# Altium PCB PCB_A0.PcbDoc
Units mil, origin at the board's own origin, x right, y up, seen from the top; angles counter-clockwise.
Board outline 3937.01 x 3937.01 mil, 2 copper layers (Top Layer, Bottom Layer); 126 components, 110 nets, 442 pads, 52 vias.
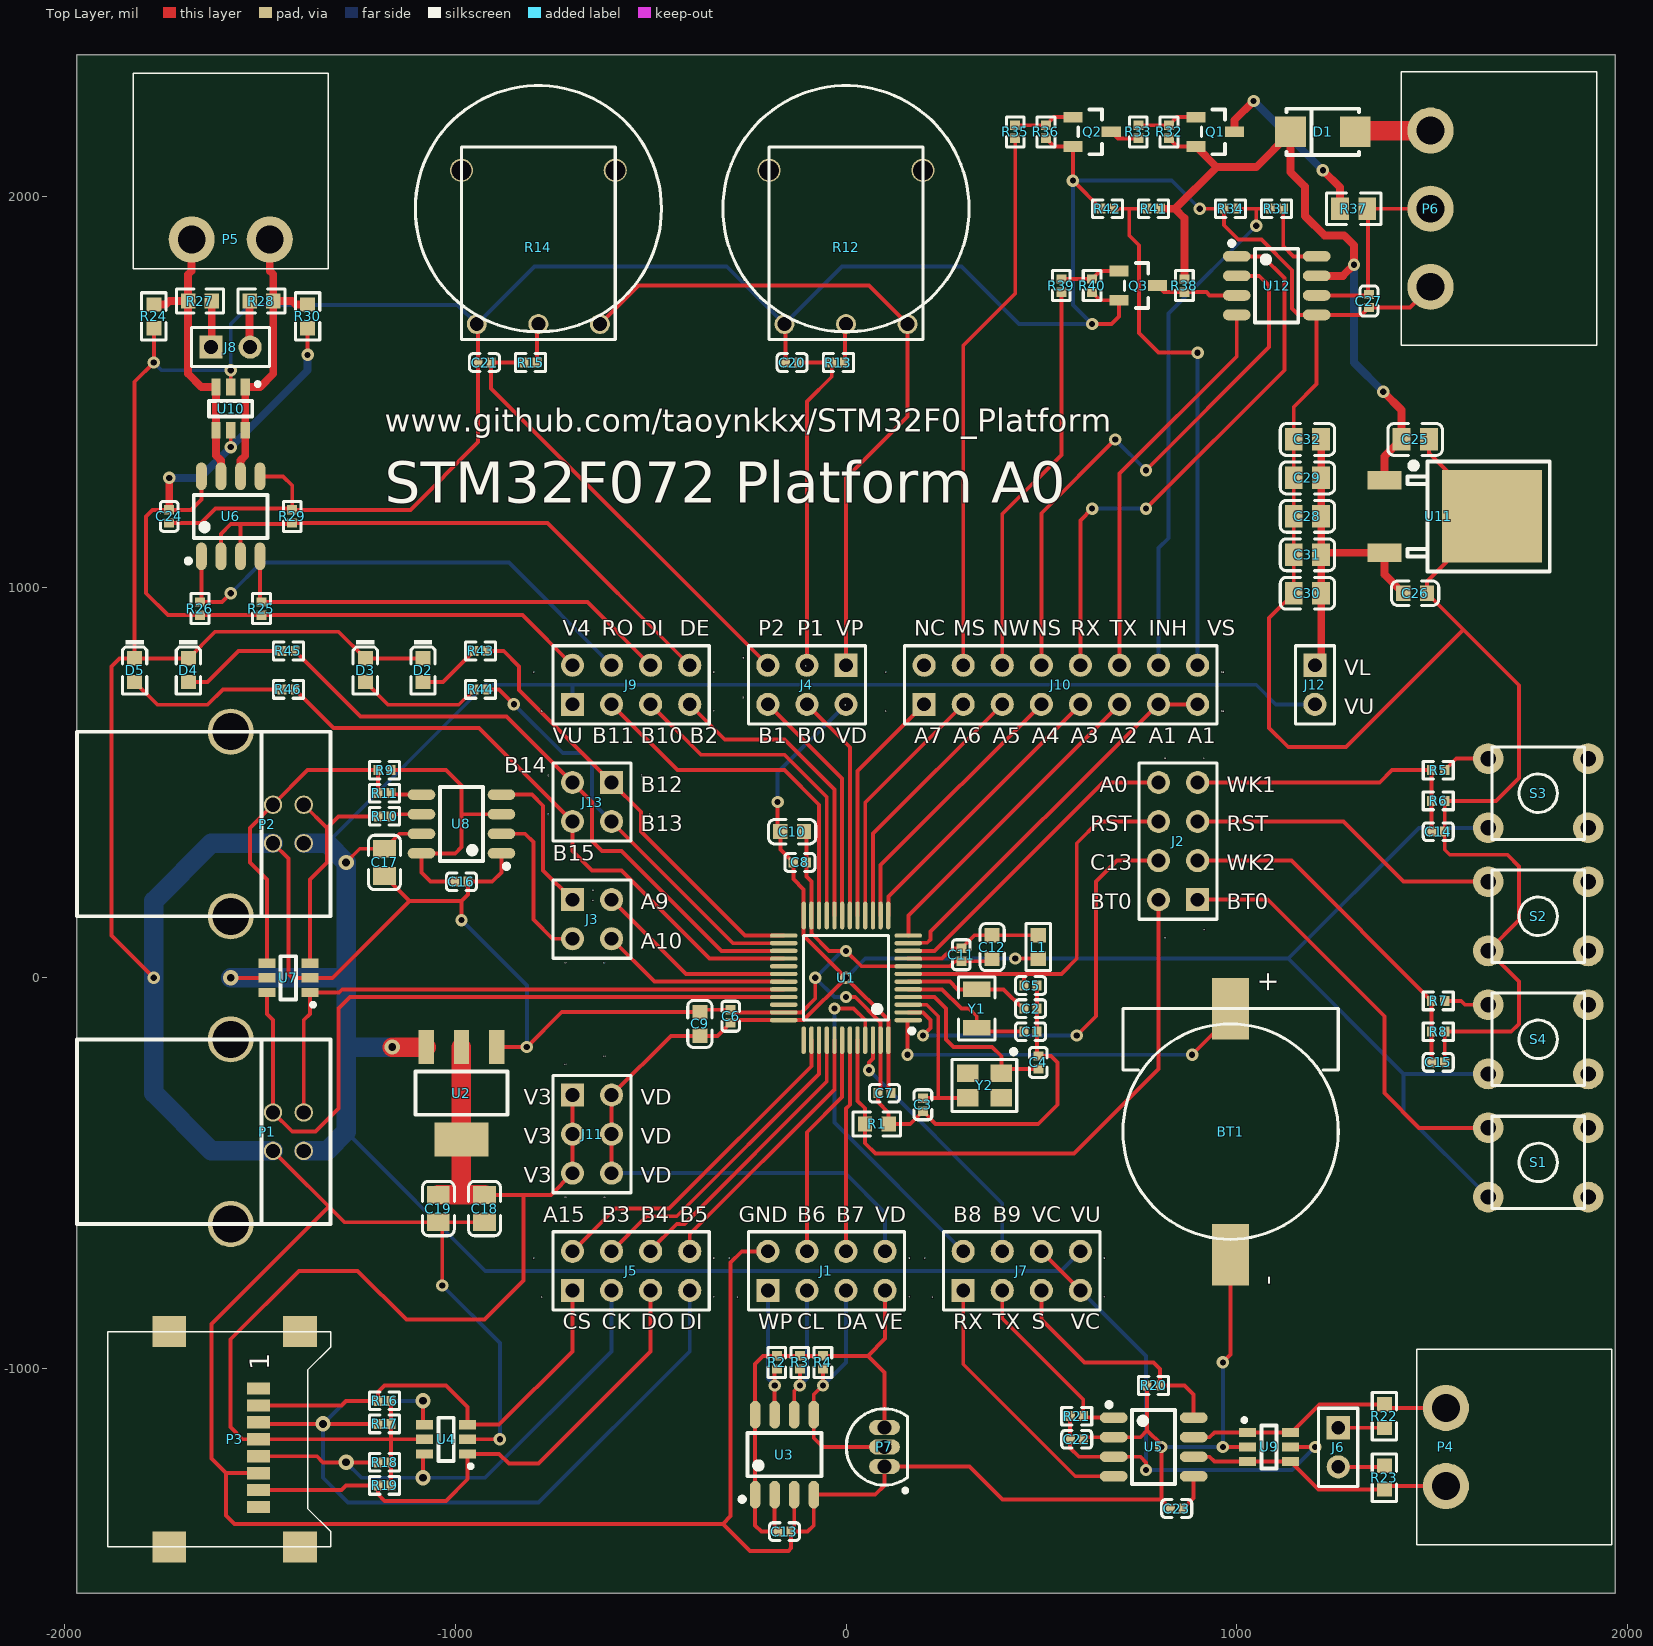
[diagram p0: Top Layer view]
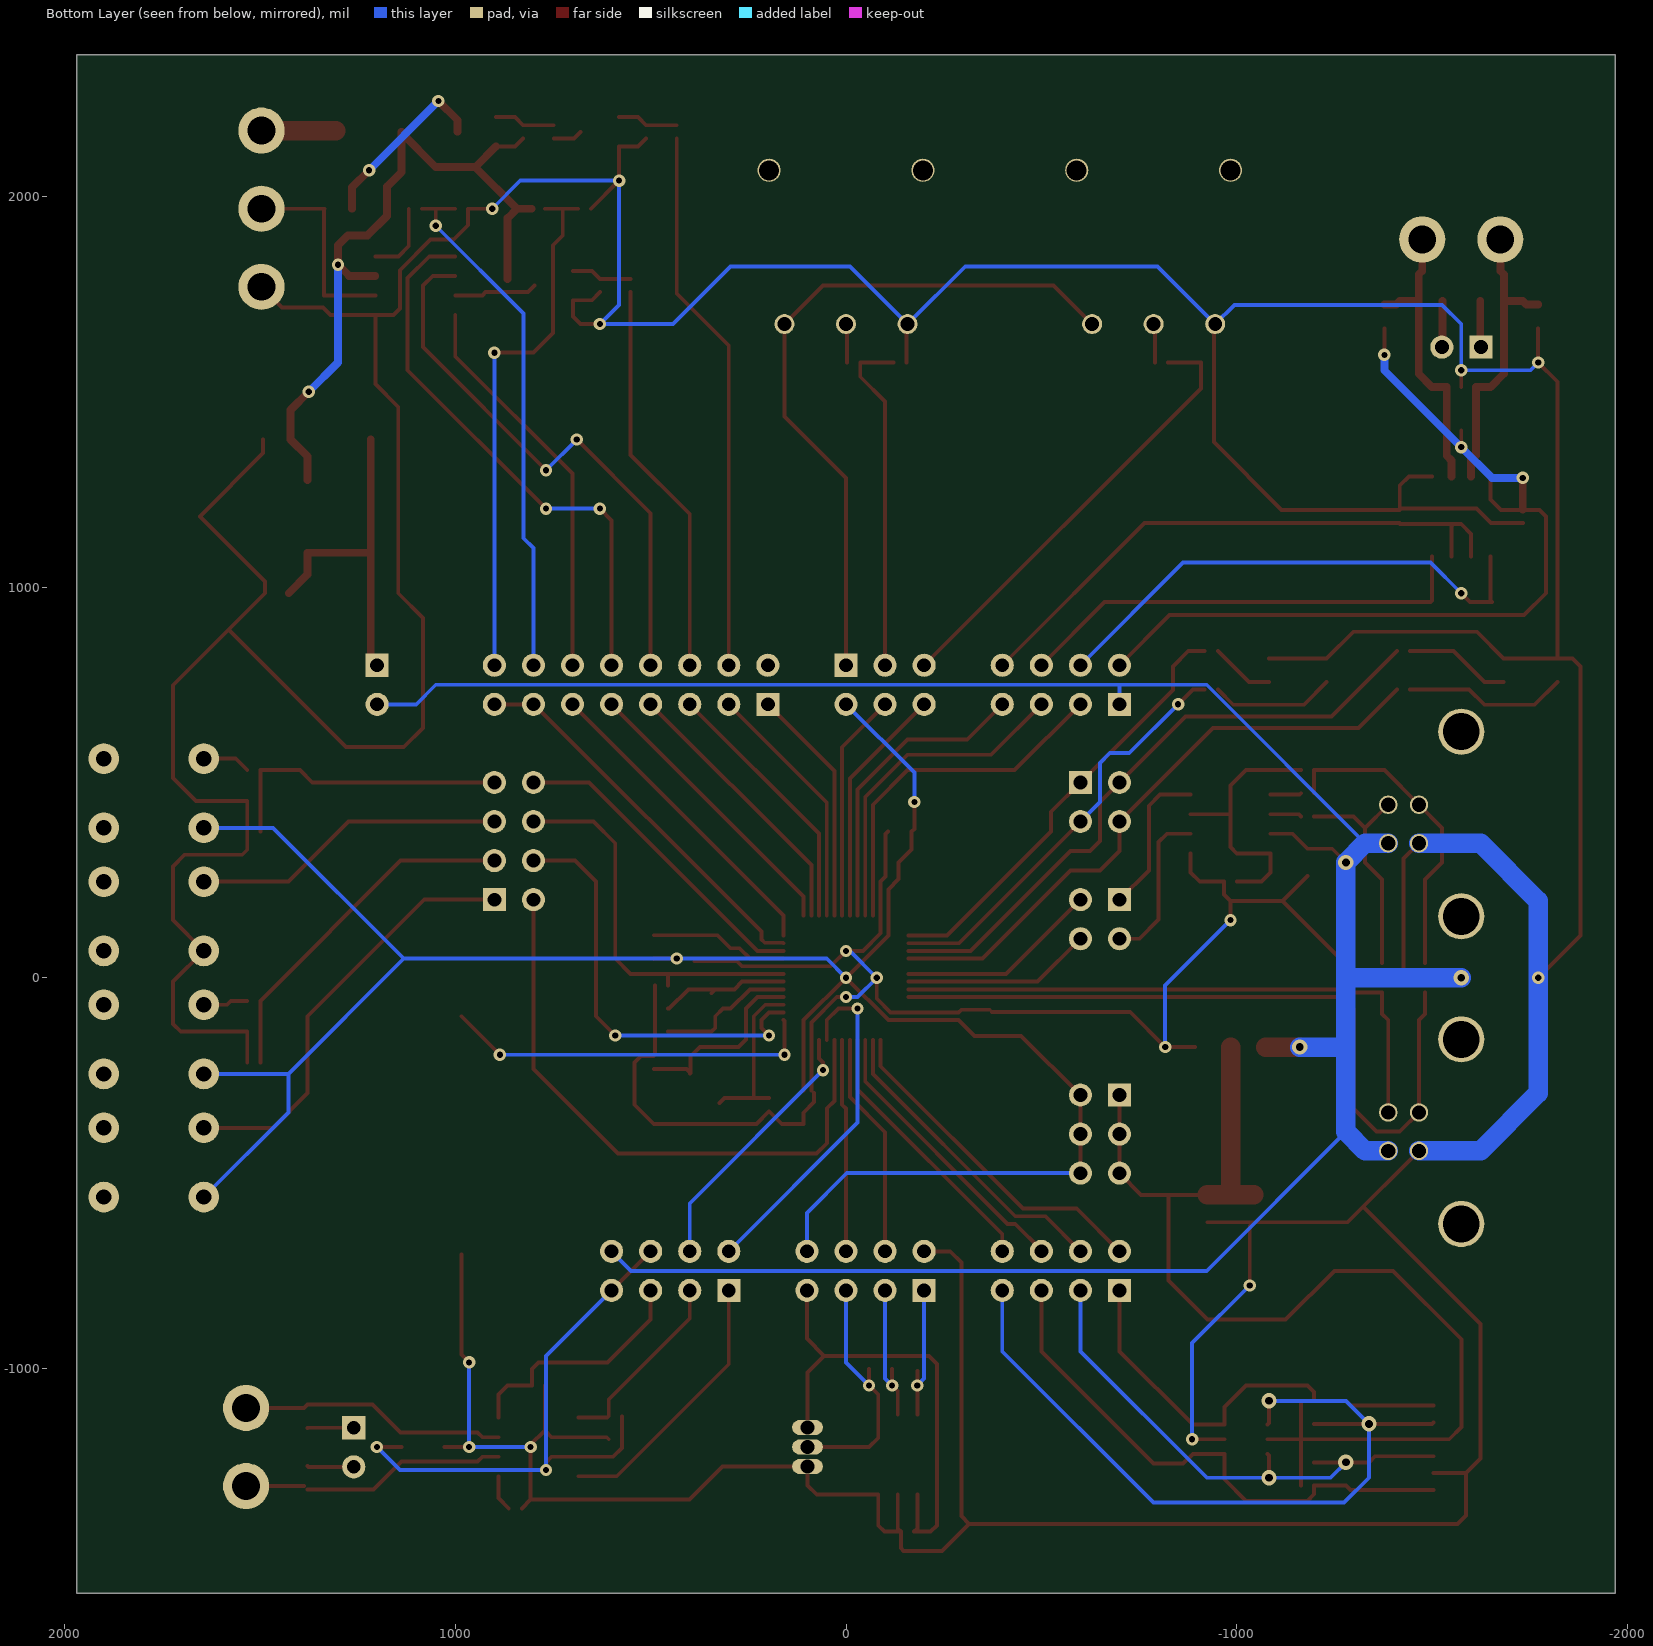
[diagram p1: Bottom Layer view, seen from below]
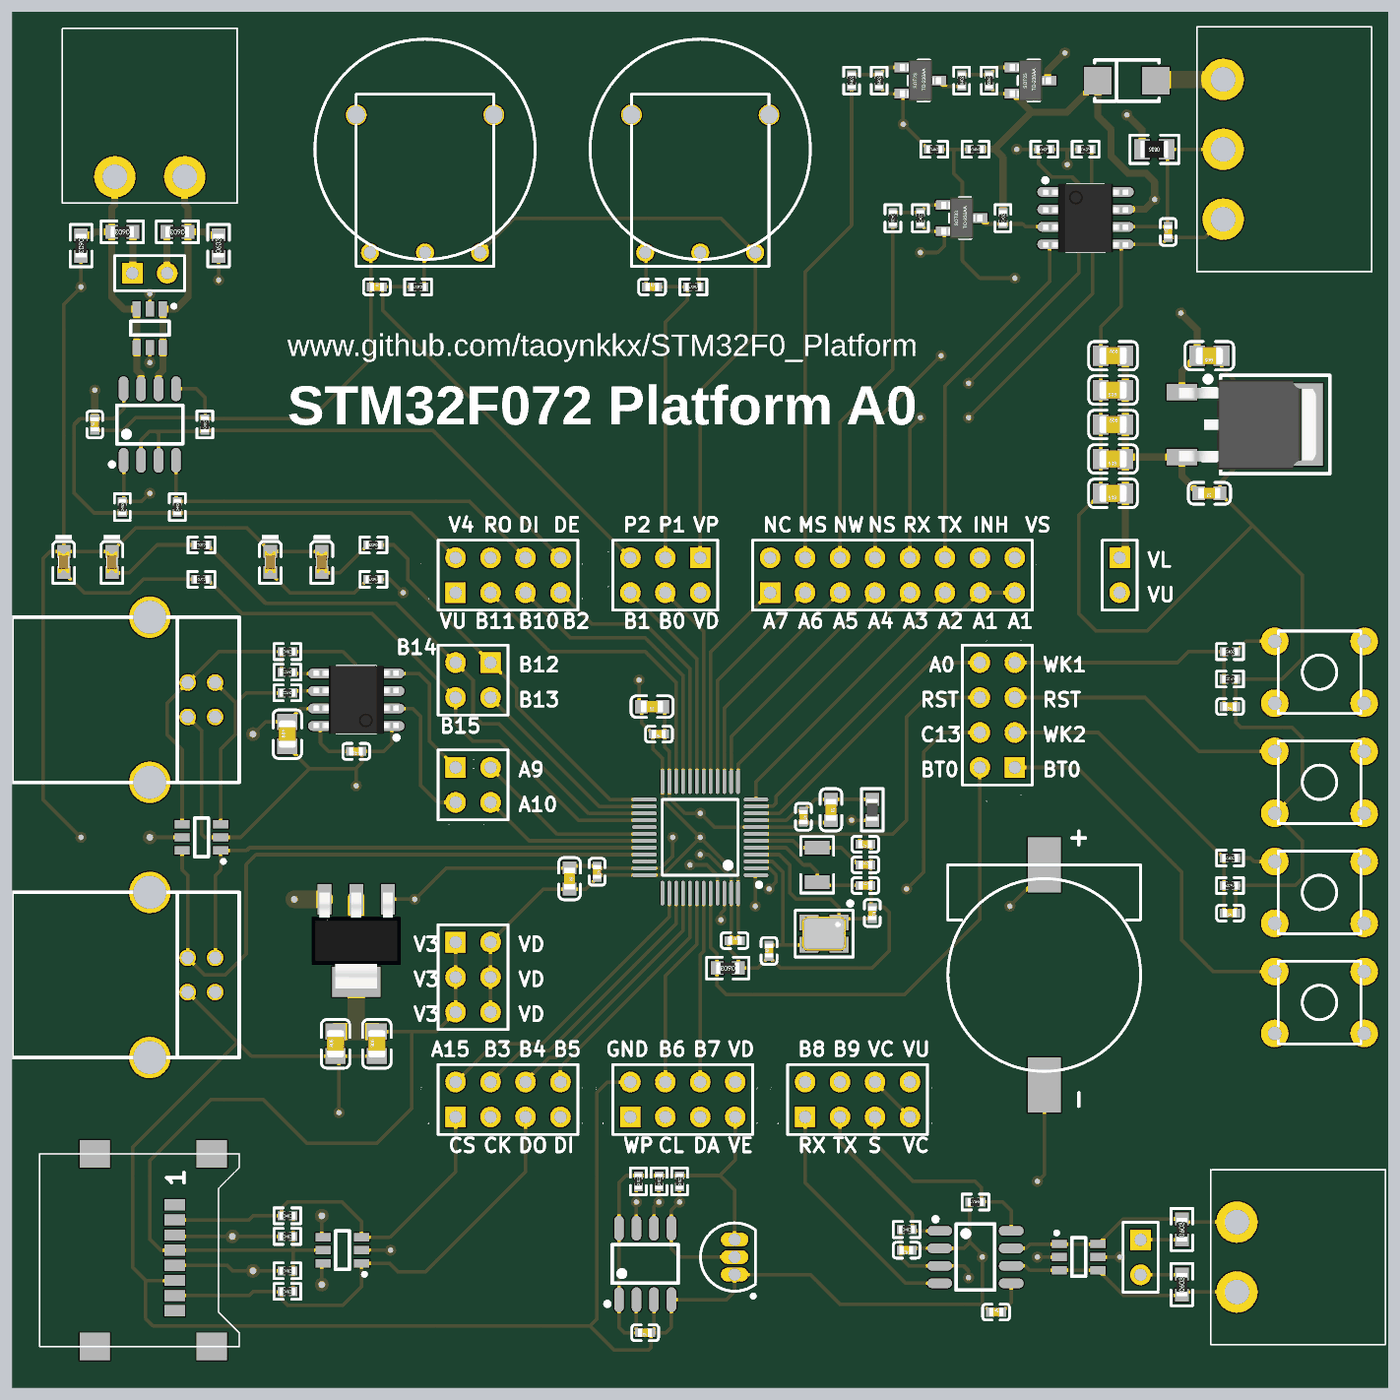
[diagram p2: 3D render of the assembled board from above, using the file's embedded part models]

## Layer stack, top to bottom
Top Layer: signal copper 1.4
Dielectric: dielectric 12.6, FR-4, Dk 4.8
Bottom Layer: signal copper 1.4

## Board outline
-1968.5,-1574.8 -1968.5,2362.2 1968.5,2362.2 1968.5,-1574.8

## Design rules (kind name [scope] priority, off if disabled: settings)
Clearance [All] p1: gap=8
MinimumSolderMaskSliver [All] p1 off: minsoldermaskwidth=10
PolygonConnect [All] p1: connectstyle=Relief reliefconductorwidth=10 reliefentries=4 polygonreliefangle="90 Angle"
RoomDefinition LED [InComponentClass('LED')] p1: confinementstyle=ConfineIn formatcopy=TRUE lockcomponents=TRUE outline -2047.24,590.55 -787.4,590.55 -787.4,984.25 -2047.24,984.25
RoomDefinition LIN [InComponentClass('LIN')] p2: confinementstyle=ConfineIn formatcopy=TRUE lockcomponents=FALSE outline 393.7,787.4 1968.5,787.4 1968.5,2362.2 393.7,2362.2
RoomDefinition 485 [InComponentClass('485')] p3: confinementstyle=ConfineIn formatcopy=TRUE lockcomponents=TRUE outline -1181.1,787.4 -1181.1,2362.2 -1968.5,2362.2 -1968.5,787.4
RoomDefinition CAN [InComponentClass('CAN')] p4: confinementstyle=ConfineIn formatcopy=TRUE lockcomponents=FALSE outline 393.7,-1476.38 1968.5,-1476.38 1968.5,-925.2 393.7,-925.2
RoomDefinition SPI [InComponentClass('SPI')] p5: confinementstyle=ConfineIn formatcopy=TRUE lockcomponents=TRUE outline -1968.5,-1574.8 -590.55,-1574.8 -590.55,-787.4 -1968.5,-787.4
RoomDefinition ADC [InComponentClass('ADC')] p6: confinementstyle=ConfineIn formatcopy=TRUE lockcomponents=TRUE outline -1181.1,1377.95 393.7,1377.95 393.7,2362.2 -1181.1,2362.2
RoomDefinition USB [InComponentClass('USB')] p7: confinementstyle=ConfineIn formatcopy=TRUE lockcomponents=TRUE outline -787.4,-787.4 -787.4,787.4 -2165.35,787.4 -2165.35,-787.4
RoomDefinition BTN [InComponentClass('BTN')] p8: confinementstyle=ConfineIn formatcopy=TRUE lockcomponents=TRUE outline 1377.95,-629.92 1968.5,-629.92 1968.5,629.92 1377.95,629.92
RoomDefinition MCU [InComponentClass('MCU')] p9: confinementstyle=ConfineIn formatcopy=TRUE lockcomponents=FALSE outline -590.55,-590.55 590.55,-590.55 590.55,590.55 -590.55,590.55
RoomDefinition EEPROM [InComponentClass('EEPROM')] p10: confinementstyle=ConfineIn formatcopy=TRUE lockcomponents=FALSE outline -295.28,-905.51 -295.28,-1476.38 196.85,-1476.38 196.85,-905.51
RoutingVias [All] p1: holewidth=28 width=50 viastyle="Through Hole" minholewidth=28 minwidth=50 maxholewidth=28 maxwidth=50
SilkToSilkClearance [All] p1 off: silktosilkclearance=10
SilkscreenOverComponentPads [All] p1 off: minsilkscreentomaskgap=10
SolderMaskExpansion [All] p1: expansion=4
Width [All] p1: maxlimit=50 minlimit=10 preferedwidth=10
25 further rules are at their usual default settings.

## Classes and differential pairs
component class 485: C24 J8 P5 R24 R25 R26 R27 R28 R29 R30 U6 U10
component class SPI: P3 R16 R17 R18 R19 U4
component class MCU: C1 C2 C3 C4 C5 C6 C7 C8 C9 C10 C11 C12 L1 R1 U1 Y1 Y2
component class EEPROM: C13 P7 R2 R3 R4 U3
component class BTN: C14 C15 R5 R6 R7 R8 S1 S2 S3 S4
component class USB: C16 C17 C18 C19 P1 P2 R9 R10 R11 U2 U7 U8
component class STM32F072_Platform: BT1 J1 J2 J3 J4 J5 J7 J9 J10 J11 J12 J13
component class ADC: C20 C21 R12 R13 R14 R15
component class CAN: C22 C23 J6 P4 R20 R21 R22 R23 U5 U9
component class LIN: C25 C26 C27 C28 C29 C30 C31 C32 D1 P6 Q1 Q2 Q3 R31 R32 R33 R34 R35 R36 R37 R38 R39 R40 R41 R42 U11 U12
component class LED: D2 D3 D4 D5 R43 R44 R45 R46

## Components (designator, comment, footprint, x,y, rotation, side; value= is the part's Value field where it differs from the comment)
BT1 "Battery" CR1220 984.25,-393.7 r90 top
C1 "12pF (120) 5% 50V" 0402_C 472.44,-137.8 r0 top
C2 "12pF (120) 5% 50V" 0402_C 472.44,-78.74 r0 top
C3 "20pF (200) 5% 50V" 0402_C 196.85,-324.8 r90 top
C4 "20pF (200) 5% 50V" 0402_C 492.13,-216.54 r270 top
C5 "100nF (104) 10% 16V" 0402_C 472.44,-19.69 r180 top
C6 "100nF (104) 10% 16V" 0402_C -295.28,-98.43 r270 top
C7 "100nF (104) 10% 16V" 0402_C 98.43,-295.28 r0 top
C8 "100nF (104) 10% 16V" 0402_C -118.11,295.28 r180 top
C9 "4.7uF (475) 10% 16V" 0603_C -374.02,-118.11 r270 top
C10 "4.7uF (475) 10% 16V" 0603_C -137.8,374.02 r180 top
C11 "10nF (103) 10% 50V" 0402_C 295.28,59.06 r270 top
C12 "1uF (105) 10% 50V" 0603_C 374.02,78.74 r270 top
C13 "100nF (104) 10% 16V" 0402_C -157.48,-1417.32 r180 top
C14 "100nF (104) 10% 16V" 0402_C 1515.75,374.02 r180 top
C15 "100nF (104) 10% 16V" 0402_C 1515.75,-216.54 r180 top
C16 "100nF (104) 10% 16V" 0402_C -984.25,246.06 r180 top
C17 "10uF (106) 10% 25V" 0805_C -1181.1,295.28 r90 top
C18 "10uF (106) 10% 25V" 0805_C -925.2,-590.55 r90 top
C19 "10uF (106) 10% 25V" 0805_C -1043.31,-590.55 r90 top
C20 "100nF (104) 10% 16V" 0402_C -137.8,1574.8 r0 top
C21 "100nF (104) 10% 16V" 0402_C -925.2,1574.8 r0 top
C22 "100nF (104) 10% 16V" 0402_C 590.55,-1181.1 r180 top
C23 "100nF (104) 10% 16V" 0402_C 846.46,-1358.27 r0 top
C24 "100nF (104) 10% 16V" 0402_C -1732.28,1181.1 r90 top
C25 "2.2uF (225) 20% 50V" 0805_C 1456.69,1377.95 r180 top
C26 "1uF (105) 10% 50V" 0603_C 1456.69,984.25 r180 top
C27 "220pF (221) 10% 50V" 0402_C 1338.58,1732.28 r90 top
C28 "22uF (226) 20% 25V" 0805_C 1181.1,1181.1 r0 top
C29 "22uF (226) 20% 25V" 0805_C 1181.1,1279.53 r180 top
C30 "22uF (226) 20% 25V" 0805_C 1181.1,984.25 r180 top
C31 "22uF (226) 20% 25V" 0805_C 1181.1,1082.68 r180 top
C32 "22uF (226) 20% 25V" 0805_C 1181.1,1377.95 r0 top
D1 "M7" SMA(DO-214AC)_S1 1220.47,2165.35 r0 top
D2 "红灯 0603" 0603_LED_S1 -1082.68,787.4 r270 top
D3 "绿灯 0603" 0603_LED_S1 -1230.32,787.4 r270 top
D4 "蓝灯 0603" 0603_LED_S1 -1683.07,787.4 r270 top
D5 "黄灯 0603" 0603_LED_S1 -1820.87,787.4 r270 top
J1 "EEPROM" HDR2X4 -200,-800 r0 top
J2 "BUTTON" HDR2X4 900,200 r90 top
J3 "USART1" HDR2X2 -700,200 r270 top
J4 "POTMETER" HDR2X3 0,800 r180 top
J5 "TFCard" HDR2X4 -700,-800 r0 top
J6 "TERM" HDR1X2 1259.84,-1151.57 r270 top
J7 "CAN" HDR2X4 300,-800 r0 top
J8 "TERM_485" HDR1X2 -1625,1614.17 r0 top
J9 "485" HDR2X4 -700,700 r0 top
J10 "LIN" HDR2X8 200,700 r0 top
J11 "VDD" HDR2X3 -700,-300 r270 top
J12 "V5" HDR1X2 1200,800 r270 top
J13 "LED" HDR2X2 -600,500 r180 top
L1 "47nH" 0603_L 492.13,78.74 r90 top
P1 "USB_ST" USB-B/Female -1574.8,-393.7 r270 top
P2 "USB_PL" USB-B/Female -1574.8,393.7 r270 top
P3 "TFCard" TF002 -1870.08,-1181.1 r90 top
P4 "CAN" WJ2EDGRC-5.08-2PxxR 1535.43,-1200.79 r90 top
P5 "485" WJ2EDGRC-5.08-2PxxR -1574.8,1889.76 r180 top
P6 "LIN" WJ2EDGRC-5.08-3PxxR 1496.06,1968.5 r90 top
P7 "DS18B20" TO-92A 98.43,-1200.79 r0 top
Q1 "MMBT5401 2L" SOT-23(SOT-23-3) 944.88,2165.35 r180 top
Q2 "MMBT5551  G1" SOT-23(SOT-23-3) 629.92,2165.35 r180 top
Q3 "SS8050 Y1" SOT-23(SOT-23-3) 748.03,1771.65 r180 top
R1 "10KΩ (1002) ±1%" 0603_R 78.74,-374.02 r180 top
R2 "10KΩ (1002) ±1%" 0402_R -177.17,-984.25 r90 top
R3 "4.7KΩ (4701) ±1%" 0402_R -118.11,-984.25 r90 top
R4 "4.7KΩ (4701) ±1%" 0402_R -59.06,-984.25 r90 top
R5 "1KΩ (1001) ±1%" 0402_R 1515.75,531.5 r0 top
R6 "10KΩ (1002) ±1%" 0402_R 1515.75,452.76 r180 top
R7 "1KΩ (1001) ±1%" 0402_R 1515.75,-59.06 r0 top
R8 "10KΩ (1002) ±1%" 0402_R 1515.75,-137.8 r180 top
R9 "1.5KΩ (1501) ±1%" 0402_R -1181.1,531.5 r0 top
R10 "22Ω (22R0) ±1%" 0402_R -1181.1,413.39 r180 top
R11 "22Ω (22R0) ±1%" 0402_R -1181.1,472.44 r180 top
R12 "10K" AIN16 0,1968.5 r0 top
R13 "100Ω (1000) ±1%" 0402_R -19.69,1574.8 r180 top
R14 "10K" AIN16 -787.4,1968.5 r0 top
R15 "100Ω (1000) ±1%" 0402_R -807.09,1574.8 r180 top
R16 "10KΩ (1002) ±1%" 0402_R -1181.1,-1082.68 r0 top
R17 "10KΩ (1002) ±1%" 0402_R -1181.1,-1141.73 r0 top
R18 "10KΩ (1002) ±1%" 0402_R -1181.1,-1240.16 r0 top
R19 "10KΩ (1002) ±1%" 0402_R -1181.1,-1299.21 r0 top
R20 "10KΩ (1002) ±1%" 0402_R 787.4,-1043.31 r180 top
R21 "10KΩ (1002) ±1%" 0402_R 590.55,-1122.05 r0 top
R22 "68Ω (68R0) ±1%" 0603_R 1377.95,-1122.05 r90 top
R23 "68Ω (68R0) ±1%" 0603_R 1377.95,-1279.53 r90 top
R24 "470Ω (4700) ±1%" 0603_R -1771.65,1692.91 r270 top
R25 "10KΩ (1002) ±1%" 0402_R -1496.06,944.88 r90 top
R26 "10KΩ (1002) ±1%" 0402_R -1653.54,944.88 r90 top
R27 "68Ω (68R0) ±1%" 0603_R -1653.54,1732.28 r180 top
R28 "68Ω (68R0) ±1%" 0603_R -1496.06,1732.28 r180 top
R29 "10KΩ (1002) ±1%" 0402_R -1417.32,1181.1 r90 top
R30 "470Ω (4700) ±1%" 0603_R -1377.95,1692.91 r90 top
R31 "10KΩ (1002) ±1%" 0402_R 1102.36,1968.5 r0 top
R32 "10KΩ (1002) ±1%" 0402_R 826.77,2165.35 r270 top
R33 "1KΩ (1001) ±1%" 0402_R 748.03,2165.35 r90 top
R34 "1KΩ (1001) ±1%" 0402_R 984.25,1968.5 r0 top
R35 "1KΩ (1001) ±1%" 0402_R 433.07,2165.35 r90 top
R36 "10KΩ (1002) ±1%" 0402_R 511.81,2165.35 r90 top
R37 "1KΩ (1001) ±1%" 0805_R 1299.21,1968.5 r180 top
R38 "10KΩ (1002) ±1%" 0402_R 866.14,1771.65 r90 top
R39 "1KΩ (1001) ±1%" 0402_R 551.18,1771.65 r270 top
R40 "10KΩ (1002) ±1%" 0402_R 629.92,1771.65 r90 top
R41 "10KΩ (1002) ±1%" 0402_R 787.4,1968.5 r0 top
R42 "1KΩ (1001) ±1%" 0402_R 669.29,1968.5 r0 top
R43 "1KΩ (1001) ±1%" 0402_R -935.04,836.61 r180 top
R44 "1KΩ (1001) ±1%" 0402_R -935.04,738.19 r180 top
R45 "1KΩ (1001) ±1%" 0402_R -1427.17,836.61 r180 top
R46 "1KΩ (1001) ±1%" 0402_R -1427.17,738.19 r180 top
S1 "BOOT" SW-6x6 1771.65,-472.44 r270 top
S2 "RESET" SW-6x6 1771.65,157.48 r270 top
S3 "WK1" SW-6x6 1771.65,472.44 r270 top
S4 "WK2" SW-6x6 1771.65,-157.48 r270 top
U1 "STM32F072C8T6" LQFP-48_7x7x05P 0,0 r90 top
U2 "AMS1117-3.3" SOT-223 -984.25,-295.28 r90 top
U3 "EEPROM/AT24C256C-SSHL-T" SOIC-8_150mil -157.48,-1220.47 r0 top
U4 "SRV05-4-P-T7" SOT-23-6 -1023.62,-1181.1 r0 top
U5 "CAN/TJA1050T/CM" SOIC-8_150mil 787.4,-1200.79 r270 top
U6 "SP485EEN-L/TR" SOIC-8_150mil -1574.8,1181.1 r0 top
U7 "SRV05-4-P-T7" SOT-23-6 -1427.17,0 r0 top
U8 "PL2303SA" SOP-8_150mil -984.25,393.7 r90 top
U9 "SRV05-4-P-T7" SOT-23-6 1082.68,-1200.79 r180 top
U10 "SRV05-4-P-T7" SOT-23-6 -1574.8,1456.69 r90 top
U11 "L78M05ABDT-TR" TO-252-2-180 1377.95,1181.1 r0 top
U12 "TJA1020" SOP-8_150mil 1102.36,1771.65 r270 top
Y1 "32.768KHz ±20ppm 12.5pF" "SMD-3215_2P FC - 135" 334.65,-78.74 r270 top
Y2 "12MHZ 20PF 10PPM" SMD-3225_4P 354.33,-275.59 r180 top

## Footprints (in the part's own frame and the unit in brackets; to place one, negate y for a bottom-side part, rotate by r counter-clockwise, add the part's x,y. Pads: shape width x height; smd on the part's side, far side on the other; paste and mask are expansions set on the pad)
0402_C [mm]
  rect 0.6x0.65 smd mask+0.051: 1(-0.425,0) 2(0.425,0)
  silkscreen extent -0.97,-0.58 0.97,0.58, body extent -0.48,-0.3 0.52,0.3, height 0.2
0402_R [mm]
  rect 0.6x0.65 smd mask+0.051: 1(-0.425,0) 2(0.425,0)
  silkscreen extent -0.97,-0.58 0.97,0.58, body extent -0.57,-0.27 0.58,0.28, height 0.41
0603_C [mm]
  rect 0.93x0.98 smd: 1(-0.77,0) 2(0.77,0)
  silkscreen extent -1.53,-0.79 1.54,0.79, body extent -0.8,-0.4 0.8,0.4, height 0.3
0603_L [mm]
  rect 0.93x0.98 smd: 1(-0.77,0) 2(0.77,0)
  silkscreen extent -1.53,-0.79 1.54,0.79, body extent -0.82,-0.41 0.83,0.41, height 0.46
0603_LED_S1 [mm]
  rect 0.93x0.98 smd: A(0.77,0) K(-0.77,0)
  silkscreen extent -1.97,-0.79 1.54,0.79, body extent -0.8,-0.4 0.8,0.4, height 0.6
0603_R [mm]
  rect 0.93x0.98 smd: 1(-0.77,0) 2(0.77,0)
  silkscreen extent -1.53,-0.79 1.54,0.79, body extent -0.85,-0.4 0.85,0.4, height 0.56
0805_C [mm]
  rect 1.16x1.47 smd: 1(-0.89,0) 2(0.89,0)
  silkscreen extent -1.77,-1.04 1.77,1.04, body extent -1,-0.62 1,0.63, height 0.77
0805_R [mm]
  rect 1.16x1.47 smd: 1(-0.89,0) 2(0.89,0)
  silkscreen extent -1.77,-1.04 1.77,1.03, body extent -1,-0.62 1,0.63, height 0.49
AIN16 [mm]
  round 1.5 hole 1.3: 0(-5,2.5) 0(5,2.5)
  round 1.3 hole 0.9: 1(-4,-7.5) 2(4,-7.5) 3(0,-7.5)
  silkscreen extent -8,-8.5 8,8, body extent -7.94,-8.5 8,7.98, height 4
CR1220 [mm]
  rect 4x2.4 smd: 1(8,0) 2(-8,0)
  silkscreen extent -7,-7 8,7, body extent -6.94,-6.99 7,6.99, height 4
HDR1X2 [mm] "Connector; Header; 2 Position"
  rect 1.5x1.5 hole 0.9: 1(0,0)
  round 1.5 hole 0.9: 2(2.54,0)
  silkscreen extent -1.27,-1.27 3.81,1.27
HDR2X2 [mm] "Connector; Header; 2x2 Position"
  rect 1.5x1.5 hole 0.9: 1(0,0)
  round 1.5 hole 0.9: 2(0,2.54) 3(2.54,0) 4(2.54,2.54)
  silkscreen extent -1.27,-1.27 3.81,3.81
HDR2X3 [mm] "Connector; Header; 3x2 Position"
  rect 1.5x1.5 hole 0.9: 1(0,0)
  round 1.5 hole 0.9: 2(0,2.54) 3(2.54,0) 4(2.54,2.54) 5(5.08,0) 6(5.08,2.54)
  silkscreen extent -1.27,-1.27 6.35,3.81
HDR2X4 [mm] "Connector; Header; 4x2 Position"
  rect 1.5x1.5 hole 0.9: 1(0,0)
  round 1.5 hole 0.9: 2(0,2.54) 3(2.54,0) 4(2.54,2.54) 5(5.08,0) 6(5.08,2.54) 7(7.62,0) 8(7.62,2.54)
  silkscreen extent -1.27,-1.27 8.89,3.81
HDR2X8 [mm] "Connector; Header; 8x2 Position"
  rect 1.5x1.5 hole 0.9: 1(0,0)
  round 1.5 hole 0.9: 2(0,2.54) 3(2.54,0) 4(2.54,2.54) 5(5.08,0) 6(5.08,2.54) 7(7.62,0) 8(7.62,2.54) 9(10.16,0) 10(10.16,2.54) 11(12.7,0) 12(12.7,2.54) 13(15.24,0) 14(15.24,2.54) 15(17.78,0) 16(17.78,2.54)
  silkscreen extent -1.27,-1.27 19.05,3.81
LQFP-48_7x7x05P [mm]
  oval 0.28x1.8 smd mask+0.051: 1(-2.75,-4.05) 2(-2.25,-4.05) 3(-1.75,-4.05) 4(-1.25,-4.05) 5(-0.75,-4.05) 6(-0.25,-4.05) 7(0.25,-4.05) 8(0.75,-4.05) 9(1.25,-4.05) 10(1.75,-4.05) 11(2.25,-4.05) 12(2.75,-4.05) 25(2.75,4.05) 26(2.25,4.05) 27(1.75,4.05) 28(1.25,4.05) 29(0.75,4.05) 30(0.25,4.05) 31(-0.25,4.05) 32(-0.75,4.05) 33(-1.25,4.05) 34(-1.75,4.05) 35(-2.25,4.05) 36(-2.75,4.05)
  oval 1.8x0.28 smd mask+0.051: 13(4.05,-2.75) 14(4.05,-2.25) 15(4.05,-1.75) 16(4.05,-1.25) 17(4.05,-0.75) 18(4.05,-0.25) 19(4.05,0.25) 20(4.05,0.75) 21(4.05,1.25) 22(4.05,1.75) 23(4.05,2.25) 24(4.05,2.75) 37(-4.05,2.75) 38(-4.05,2.25) 39(-4.05,1.75) 40(-4.05,1.25) 41(-4.05,0.75) 42(-4.05,0.25) 43(-4.05,-0.25) 44(-4.05,-0.75) 45(-4.05,-1.25) 46(-4.05,-1.75) 47(-4.05,-2.25) 48(-4.05,-2.75)
  silkscreen extent -3.6,-4.43 2.75,2.75
SMA(DO-214AC)_S1 [mm]
  rect 2x2 smd: 1(2.1,0) 2(-2.1,0)
  silkscreen extent -2.35,-1.5 2.35,1.5
"SMD-3215_2P FC - 135" [mm]
  rect 1x1.8 smd: 1(-1.25,0) 2(1.25,0)
  silkscreen extent -2.05,-1.2 2.05,1.2
SMD-3225_4P [mm]
  rect 1.4x1.15 smd: 1(-1.1,-0.8) 2(1.1,-0.8) 3(1.1,0.8) 4(-1.1,0.8)
  silkscreen extent -2.1,-2.35 2.1,1.7, body extent -1.6,-1.25 1.6,1.25, height 0.61
SOIC-8_150mil [mm]
  oval 0.7x1.8 smd: 1(-1.905,-2.6) 2(-0.635,-2.6) 3(0.635,-2.6) 4(1.905,-2.6) 5(1.905,2.6) 6(0.635,2.6) 7(-0.635,2.6) 8(-1.905,2.6)
  silkscreen extent -2.9,-3.05 2.4,1.4
SOP-8_150mil [mm]
  oval 0.7x1.8 smd: 1(-1.905,-2.6) 2(-0.635,-2.6) 3(0.635,-2.6) 4(1.905,-2.6) 5(1.905,2.6) 6(0.635,2.6) 7(-0.635,2.6) 8(-1.905,2.6)
  silkscreen extent -2.9,-3.08 2.4,1.4, body extent -2.5,-3.1 2.5,3.1, height 1.75
SOT-23(SOT-23-3) [mm]
  rect 1.25x0.7 smd: 1(1.25,-0.95) 2(1.25,0.95) 3(-1.25,0)
  silkscreen extent -0.65,-1.46 0.9,1.46, body extent -1.5,-1.5 1.5,1.5, height 1.3
SOT-23-6 [mm]
  rect 1.1x0.6 smd: 1(1.4,-0.95) 2(1.4,0) 3(1.4,0.95) 4(-1.4,0.95) 5(-1.4,0) 6(-1.4,-0.95)
  silkscreen extent -0.5,-1.87 1.73,1.4
SOT-223 [mm]
  rect 2.2x1 smd: 1(3,-2.3) 2(3,0) 3(3,2.3)
  rect 2.2x3.5 smd: 2(-3,0)
  silkscreen extent -1.4,-3 1.4,3, body extent -3.49,-3.24 3.49,3.24, height 1.64
SW-6x6 [mm]
  round 2 hole 1: 1(-2.25,-3.25) 2(2.25,-3.25) 3(2.25,3.25) 4(-2.25,3.25)
  silkscreen extent -3,-3 3,3, body extent -3,-3 3,3, height 8
TF002 [mm]
  rect 2x2.2 smd: 0(-7,-3.5) 0(-7,-12) 0(7,-3.5) 0(7,-12)
  rect 0.8x1.5 smd: 1(3.3,-9.3) 2(2.2,-9.3) 3(1.1,-9.3) 4(0,-9.3) 5(-1.1,-9.3) 6(-2.2,-9.3) 7(-3.3,-9.3) 8(-4.4,-9.3)
  silkscreen extent -7,-14 7,0.5, body extent -7,-14 7,0.5, height 2
TO-92A [mm] "TO, Flat Index; 3 In-Line, Axial Leads; Body Dia. 4.5mm; Leads 0.51 x 0.48 mm (max)"
  oval 2x1 hole 0.9: 1(0,-1.27) 2(0,0) 3(0,1.27)
  silkscreen extent -2.48,-2.95 1.5,2.48, body extent -2.5,-2.5 1.5,2.5, height 6.86
TO-252-2-180 [mm]
  rect 2.2x1.2 smd: 1(0,2.361) 3(0.004,-2.361)
  rect 6.5x6 smd: 2(7,0)
  silkscreen extent 1.5,-3.57 10.75,3.57, body extent -0.2,-3.27 9.74,3.27, height 2.44
USB-B/Female [mm]
  round 1.2 hole 0.92: 1(1.25,4.75) 2(-1.25,4.75) 3(-1.25,2.75) 4(1.25,2.75)
  round 3 hole 2.4: 5(-6,0) 6(6,0)
  silkscreen extent -6,-10 6,6.5, body extent -6,-10 6,6.5, height 10.8
WJ2EDGRC-5.08-2PxxR [mm]
  round 3 hole 1.8: 1(-2.54,0) 2(2.54,0)
  silkscreen extent -6.35,-10.79 6.35,1.91, body extent -6.35,-10.79 6.35,1.91, height 8.5
WJ2EDGRC-5.08-3PxxR [mm]
  round 3 hole 1.8: 1(-5.08,0) 2(0,0) 3(5.08,0)
  silkscreen extent -8.89,-10.79 8.89,1.91, body extent -8.89,-10.79 8.89,1.91, height 8.5

## Part data
BT1: "Multicell Battery"
C1 C2: library part "0402 12pF (120) 5% 50V", "贴片µ"
C3 C4: library part "0402 20pF (200) 5% 50V", "贴片µ"
C5 C6 C7 C8 C13 C14 C15 C16 C20 C21 C22 C23 C24: library part "0402 100nF (104) 10% 16V", "贴片µ"
C9 C10: library part "0603 4.7uF (475) 10% 16V", "贴片µ"
C11: library part "0402 10nF (103) 10% 50V", "贴片µ"
C12 C26: library part "0603 1uF (105) 10% 50V", "贴片µ"
C17 C18 C19: library part "0805 10uF (106) 10% 25V", "贴片µ"
C25: library part "0805 2.2uF (225) 20% 50V", "贴片µ"
C27: library part "0402 220pF (221) 10% 50V", "贴片µ"
C28 C29 C30 C31 C32: library part "0805 22uF (226) 20% 25V", "贴片µ"
D1: library part "SMA(DO-214AC) M7", "二极"
D2: library part "0603 红灯", "发光"
D3: library part "0603 绿灯", "发光"
D4: library part "0603 蓝灯", "发光"
D5: library part "0603 黄灯", "发光"
J1 J2 J5 J7 J9: library part "Header 4X2", "Header, 4-Pin, Dual row"
J3: library part "Header 2X2", "Header, 2-Pin, Dual row"
J4: library part "Header 3X2", "POT"
J6 J8 J12 P4 P5: library part "Header 2", "Header, 2-Pin"
J10: library part "Header 8X2", "Header, 8-Pin, Dual row"
J11: library part "Header 3X2", "Header, 3-Pin, Dual row"
J13: library part "Header 4", "Header, 4-Pin"
L1: library part "0603 47nH", "贴片µ"
P1 P2: library part USB-B/Female, "USB-B/Female"
P3: library part "Header 8", "Header, 8-Pin"
P6 P7: library part "Header 3", "Header, 3-Pin"
Q1: library part "SOT-23 MMBT5401 2L", "三极"
Q2: library part "SOT-23 MMBT5551  G1", "三极"
Q3: library part "SOT-23 SS8050 Y1", "三极"
R1: library part "0603 10KΩ (1002) 1%", "贴片"
R2 R6 R8 R16 R17 R18 R19 R20 R21 R25 R26 R29 R31 R32 R36 R38 R40 R41: library part "0402 10KΩ (1002) 1%", "贴片"
R3 R4: library part "0402 4.7KΩ (4701) 1%", "贴片"
R5 R7 R33 R34 R35 R39 R42 R43 R44 R45 R46: library part "0402 1KΩ (1001) 1%", "贴片"
R9: library part "0402 1.5KΩ (1501) 1%", "贴片"
R10 R11: library part "0402 22Ω (22R0) 1%", "贴片"
R12 R14: library part "Res Tap", "Tapped Resistor"
R13 R15: library part "0402 100Ω (1000) 1%", "贴片"
R22 R23 R27 R28: library part "0603 68Ω (68R0) 1%", "贴片"
R24 R30: library part "0603 470Ω (4700) 1%", "贴片"
R37: library part "0805 1KΩ (1001) 1%", "贴片"
S1 S2 S3 S4: library part SW-PB, "Switch"
U1: "ARM"
U2: library part "SOT-223 AMS1117-3.3", "低压差线性稳Ñ"
U3: library part EEPROM/AT24C256C-SSHL-T_[C6482], "EEPROM"
U4 U7 U9 U10: library part SRV05-4-P-T7_[C85364], "TVS"
U5: library part CAN/TJA1050T/CM_[C6952], "CAN"
U6: library part SP485EEN-L/TR_[C6855], "RS-485/RS-422"
U11: library part "TO-252-2 L78M05ABDT-TR", "低压差线性稳Ñ"
Y1: library part "SMD-3215_2P 32.768KHz 20ppm 12.5pF", "贴片¾"
Y2: library part "SMD-3225_4P  12MHZ 20PF 10PPM", "贴片¾"

## Via types
v1: diameter 31.5, hole 15.75, Top Layer to Bottom Layer, tented both sides, 45 vias
v2: diameter 39.37, hole 19.68, Top Layer to Bottom Layer, tented both sides, 7 vias

## Nets (pads, with @x,y where several pads share a name; then routed paths per layer and width w, separated by ;. In a path a pad name is that pad's centre, name@x,y a point inside that pad or via, vN(x,y) a via of type N, cw(c..) or ccw(c..) an arc to the next point about the centre after c; other vN are vias at no path point)
485_A: P5.1 R28.1 R30.2 U6.6 U10.1 U10.6 | length 758.3
  Top Layer w20: U6.6 -1549.8,1324.21 -1537.4,1336.61 U10.6 U10.1 -1500,1511.81 -1465.75,1546.06 R28.1 ; P5.1 -1474.8,1809.45 -1465.75,1800.39 R28.1 ; R30.2 -1408.27,1723.23 -1417.32,1732.28 R28.1
485_B: P5.2 R24.1 R27.2 U6.7 U10.3 U10.4 | length 758.3
  Top Layer w20: R24.1 -1741.34,1723.23 -1732.28,1732.28 R27.2 ; P5.2 -1674.8,1809.45 -1683.86,1800.39 R27.2 ; U6.7 -1599.8,1324.21 -1612.2,1336.61 U10.4 U10.3 -1649.61,1511.81 -1683.86,1546.06 R27.2
485_RX/PB11: J9.3 U1.22 | length 921.1
  Top Layer w10: J9.3 -431.5,531.5 -157.48,531.5 -68.9,442.91 U1.22
485_TX/PB10: J9.5 U1.21 | length 852.3
  Top Layer w10: J9.5 -370.87,570.87 -157.48,570.87 -49.21,462.6 U1.21
ADC_IN8/PB0: J4.4 U1.18 | length 586
  Top Layer w10: J4.4 9.84,590.16 U1.18
ADC_IN9/PB1: J4.6 U1.19 | length 619.3
  Top Layer w10: J4.6 -9.84,509.84 U1.19
BOOT: J2.1 S1.1 | length 1100.9
  Top Layer w10: J2.1 1079.53,200 1377.95,-98.43 1377.95,-295.28 1466.54,-383.86 S1.1
BOOT0: J2.2 R1.2 U1.44 | length 1557.5
  Top Layer w10: U1.44 29.53,-314.96 48.43,-333.86 R1.2 48.43,-423.43 75,-450 583.46,-450 800,-233.46 J2.2
CAN_RX/PB8: J7.2 U1.45 | length 899.9
  Top Layer w10: v1(-29.53,-78.74) 19.69,-78.74 49.21,-108.27 U1.45
  Bottom Layer w10: v1(-29.53,-78.74) -29.53,-370.47 J7.2
CAN_RXD: J7.1 U5.4 | length 692.8
  Top Layer w10: J7.1 300,-988.98 586.81,-1275.79 U5.4
CAN_TX/PB9: J7.4 U1.46 | length 685.9
  Top Layer w10: v1(59.06,-236.22) 59.06,-216.54 68.9,-206.69 U1.46
  Bottom Layer w10: v1(59.06,-236.22) 400,-577.17 J7.4
CAN_TXD: J7.3 R21.2 U5.1 | length 487.2
  Top Layer w10: J7.3 400,-872.44 607.28,-1079.72 R21.2 611.02,-1125.79 U5.1
CANH: P4.2 R22.2 U5.7 U9.1 U9.6 | length 697
  Top Layer w10: U5.7 930.51,-1175.79 942.91,-1163.39 U9.1 U9.6 1139.76,-1163.39 1211.42,-1091.73 R22.2 1387.01,-1100.79 P4.2 P4.2@1526.38,-1091.73
CANL: P4.1 R23.1 U5.6 U9.3 U9.4 | length 671.4
  Top Layer w10: U5.6 930.51,-1225.79 942.91,-1238.19 U9.3 U9.4 1209.45,-1309.84 R23.1 ; R23.1@1387.01,-1300.79 P4.1
CS: J5.1 P3.2 R16.1 U4.3 | length 1140.2
  Top Layer w10: P3.2 -1291.34,-1094.49 -1279.53,-1082.68 R16.1 -1197.83,-1060.04 -1181.1,-1043.31 -1023.62,-1043.31 -968.5,-1098.43 U4.3 -887.8,-1143.7 -700,-955.91 J5.1
DBG_RX/PA10: J3.4 U1.31 | length 486
  Top Layer w10: J3.4 -490.16,-9.84 U1.31
DBG_TX/PA9: J3.2 U1.30 | length 519.3
  Top Layer w10: J3.2 -409.84,9.84 U1.30
DI: J5.7 P3.3 R17.1 U4.4 | length 2069.9
  Top Layer w10: P3.3 -1500,-1141.73 R17.1 ; v2(-1082.68,-1082.68) -1082.68,-1139.76 U4.4
  Bottom Layer w10: v2(-1082.68,-1082.68) -1279.53,-1082.68 v2(-1338.58,-1141.73) -1338.58,-1279.53 -1274.8,-1343.31 -787.4,-1343.31 -400,-955.91 J5.7
DM: P1.2 U1.32 U7.1 | length 1529.5
  Top Layer w10: P1.2 -1387.8,-108.27 -1372.05,-92.52 U7.1 -1297.24,-37.4 -1289.37,-29.53 U1.32
DM_PL: P2.2 R10.2 U7.3 | length 591
  Top Layer w10: P2.2 -1328.74,383.86 ; U7.3 -1372.05,251.97 -1328.74,295.28 -1328.74,383.86 ; R10.2 -1299.21,413.39 -1328.74,383.86
DO: J5.5 P3.7 R19.1 U4.1 | length 1411.4
  Top Layer w10: P3.7 -1291.34,-1311.02 -1279.53,-1299.21 R19.1 -1197.83,-1321.85 -1181.1,-1338.58 -1023.62,-1338.58 -968.5,-1283.46 U4.1 -887.8,-1218.5 -862.99,-1243.31 -787.4,-1243.31 -500,-955.91 J5.5
DP: P1.3 U1.33 U7.6 | length 1933.7
  Top Layer w10: U7.6 -1482.28,-92.52 -1466.54,-108.27 P1.3 -1417.32,-393.7 -1358.27,-393.7 -1299.21,-334.65 -1299.21,-78.74 -1269.68,-49.21 U1.33
DP_PL: P2.3 R9.1 R11.2 U7.4 | length 812.4
  Top Layer w10: U7.4 -1482.28,251.97 -1525.59,295.28 -1525.59,383.86 P2.3 -1377.95,531.5 R9.1 R11.2
EEP_SCL/PB6: J1.4 U1.42 | length 577.9
  Top Layer w10: J1.4 -100,-395.28 -9.84,-305.12 U1.42
EEP_SDA/PB7: J1.6 U1.43 | length 544.6
  Top Layer w10: J1.6 0,-334.65 9.84,-324.8 U1.43
GND: BT1.2 C1.2 C2.2 C3.1 C4.1 C5.1 C6.1 C7.1 C8.1 C9.1 C10.1 C11.2 C12.2 C13.1 C14.1 C15.1 C16.1 C17.1 C18.1 C19.1 C20.1 C21.1 C22.1 C23.1 C24.1 C25.1 C26.1 C27.1 C28.1 C29.2 C30.2 C31.2 C32.1 D2.K D3.K D4.K D5.K J1.2 P1.4 P2.4 P3.6 P6.1 P7.1 Q2.2 Q3.2 R1.1 R6.1 R8.1 R12.1 R14.1 R20.2 R24.2 R29.2 R34.1 R36.1 R40.1 R42.1 S2.2 U1.8 U1.23 U1.35 U1.47 U2.1 U3.3 U3.4 U4.2 U5.2 U6.5 U7.2 U8.1 U9.2 U10.2 U11.2 U12.5 | length 26045.9
  Top Layer w10: v1(-1771.65,0) -1879.92,108.27 -1879.92,797.24 -1859.45,817.72 D5.K ; R24.2 v1(-1771.65,1574.8) -1820.87,1525.59 D5.K ; C24.1 -1650.59,1164.37 -1614.17,1200.79 -1417.32,1200.79 -1417.32,1259.84 -1440.94,1283.46 U6.5 ; U10.2 v1(-1574.8,1555.12) ; P3.6 -1586.61,-1267.72 ; P1.4 -1283.86,-625.59 C19.1 C18.1 ; P2.4 -1427.17,305.12 -1427.17,9.84 -1417.32,0 U7.2 -1314.57,0 -1117.72,196.85 ; R29.2 -1115.16,1197.83 -941.93,1371.06 C21.1 -941.93,1670.28 R14.1 ; -1328.74,-590.55 -1624.02,-885.83 -1624.02,-1230.32 -1586.61,-1267.72 ; C17.1 -1117.72,196.85 ; D2.K D3.K -1298.43,885.83 -1614.96,885.83 D4.K D5.K ; v1(-1033.46,-787.4) C19.1@-1033.46,-635.43 ; v1(-984.25,147.64) -984.25,196.85 ; U4.2 v1(-885.83,-1181.1) ; U2.1 v1(-816.93,-177.17) -727.56,-87.8 C9.1 ; U8.1 -881.89,269.68 -905.51,246.06 C16.1 -967.52,213.58 -984.25,196.85 ; C9.1@-367.91,-81.69 C6.1 -288.39,-88.58 U1.35 -114.04,-88.58 -78.74,-53.28 v1(-78.74,0) ; J1.2 -266.93,-700 -295.28,-728.35 -295.28,-1377.95 -314.96,-1397.64 ; R12.1 -154.53,1670.28 C20.1 ; U3.3 -132.48,-1409.06 C13.1 ; C10.1 -101.38,367.91 C8.1 -101.38,258.86 -88.58,246.06 U1.23 -88.58,114.04 -43.44,68.9 v1(0,68.9) 39.37,29.53 U1.8 265.75,29.53 278.54,42.32 C11.2 C12.2@387.6,42.32 ; v1(0,-49.21) 23.76,-49.21 88.58,-114.04 U1.47 C7.1@88.58,-288.39 ; C7.1 81.69,-317.91 109.06,-345.28 R1.1 164.37,-374.02 C3.1 229.33,-374.02 492.13,-374.02 541.34,-324.8 541.34,-216.54 524.61,-199.8 C4.1 489.17,-196.85 C1.2 C5.1 ; R36.1 532.48,2127.95 Q2.2 v1(580.71,2040.35) R42.1 ; C22.1 612.6,-1175.79 U5.2 753.35,-1175.79 770.67,-1158.46 ; v1(629.92,1673.23) 679.13,1673.23 698.82,1692.91 Q3.2 650.59,1734.25 R40.1 ; R20.2 770.67,-1158.46 ; C23.1 807.09,-1335.63 ; v1(905.51,1968.5) R34.1 967.52,1926.18 1003.94,1889.76 1062.99,1889.76 1141.73,1811.02 1141.73,1712.6 1157.68,1696.65 U12.5 ; v1(964.57,-1200.79) U9.2 ; v1(964.57,-984.25) 984.25,-964.57 BT1.2 ; C25.1 1491.73,1342.91 U11.2 1487.01,1014.57 C26.1 1722.44,748.82 1722.44,511.81 1663.39,452.76 R6.1 C14.1 1532.48,327.76 1545.28,314.96 1692.91,314.96 1722.44,285.43 1722.44,147.64 S2.2 1722.44,-9.84 1722.44,-118.11 1702.76,-137.8 R8.1 C15.1 ; P6.1 1443.11,1715.55 C27.1 1319.68,1696.65 U12.5 ; 1575.59,886.61 1279.53,590.55 1131.89,590.55 1082.68,639.76 1082.68,920.87 C30.2 C31.2 C28.1 C29.2 C32.1 1146.06,1461.02 1204.72,1519.69 U12.5 ; -1586.61,-1267.72 -1586.61,-1375.98 -1564.96,-1397.64 -314.96,-1397.64 ; -1117.72,196.85 -984.25,196.85 ; -314.96,-1397.64 -246.06,-1466.54 -147.64,-1466.54 -140.75,-1459.65 C13.1 ; C13.1 -98.43,-1417.32 -82.48,-1401.38 U3.4 74.8,-1322.83 98.43,-1299.21 P7.1 315.75,-1250.79 400.59,-1335.63 807.09,-1335.63 ; 770.67,-1158.46 807.09,-1194.88 v1(807.09,-1200.79) 807.09,-1335.63
  Bottom Layer w10: v1(-1771.65,1574.8) -1751.97,1555.12 v1(-1574.8,1555.12) -1574.8,1673.23 -1525.59,1722.44 -994.09,1722.44 R14.1 -797.24,1820.87 -305.12,1820.87 R12.1 -9.84,1820.87 295.28,1820.87 442.91,1673.23 v1(629.92,1673.23) 580.71,1722.44 v1(580.71,2040.35) 833.66,2040.35 v1(905.51,1968.5) ; v1(-1033.46,-787.4) -885.83,-935.04 v1(-885.83,-1181.1) ; v1(-984.25,147.64) -816.93,-19.69 v1(-816.93,-177.17) ; v1(0,-49.21) -29.53,-49.21 v1(-78.74,0) -9.84,68.9 v1(0,68.9) ; v1(807.09,-1200.79) v1(964.57,-1200.79) v1(964.57,-984.25)
  Bottom Layer w50: P1.4 -1624.02,-442.91 -1771.65,-295.28 -1771.65,196.85 -1624.02,344.49 P2.4
INH: R31.2 U12.8 | length 192
  Top Layer w10: R31.2 1119.09,1873.03 1145.47,1846.65 U12.8
LIN: C27.2 P6.2 R37.1 U12.6 | length 516
  Top Layer w10: U12.6 1336.22,1746.65 1336.22,1966.54 R37.1 P6.2
LIN_RX/PA3: J10.9 U1.13 | length 744.2
  Top Layer w10: U1.13 108.27,208.27 J10.9
LIN_TX/PA2: J10.11 U1.12 | length 815.6
  Top Layer w10: U1.12 159.45,159.45 J10.11
NetC1_1: C1.1 U1.5 Y1.2 | length 358.4
  Top Layer w10: U1.5 246.06,-29.53 295.28,-78.74 314.96,-78.74 334.65,-98.43 Y1.2 344.49,-137.8 C1.1
NetC2_1: C2.1 U1.6 Y1.1 | length 338.7
  Top Layer w10: U1.6 265.75,-9.84 285.43,-29.53 Y1.1 ; Y1.1@344.49,-39.37 Y1.1 ; C2.1 452.76,-78.74 403.54,-29.53 Y1.1
NetC3_2: C3.2 U1.3 Y2.3 | length 430.2
  Top Layer w10: U1.3 206.69,-68.9 236.22,-98.43 236.22,-308.07 ; C3.2 236.22,-308.07 ; Y2.3@310.04,-308.07 236.22,-308.07 ; Y2.3 Y2.3@324.02,-320.08
NetC4_2: C4.2 U1.4 Y2.1 | length 491
  Top Layer w10: U1.4 226.38,-49.21 255.91,-78.74 255.91,-157.48 275.59,-177.17 374.02,-177.17 397.64,-200.79 Y2.1 ; Y2.1@398.82,-245.28 Y2.1 ; C4.2 408.46,-233.27 Y2.1
NetC20_2: C20.2 J4.3 R13.2 | length 885.8
  Top Layer w10: C20.2 R13.2 -36.42,1538.39 -100,1474.8 J4.3
NetC21_2: C21.2 J4.5 R15.2 | length 1152.9
  Top Layer w10: R15.2 C21.2 -908.46,1508.46 J4.5
NetC23_2: C23.2 U5.5 | length 93.5
  Top Layer w10: C23.2 889.76,-1331.69 U5.5
NetD1_1: D1.1 P6.3 | length 189.8
  Top Layer w50: D1.1@1306.3,2168.5 P6.3
NetD2_A: D2.A R43.2 | length 163.8
  Top Layer w10: D2.A -1031.3,757.09 R43.2
NetD3_A: D3.A R44.2 | length 319
  Top Layer w10: D3.A -1172.05,698.82 -991.14,698.82 R44.2
NetD4_A: D4.A R45.2 | length 272.1
  Top Layer w10: D4.A -1634.65,757.09 -1555.12,836.61 R45.2
NetD5_A: D5.A R46.2 | length 417.4
  Top Layer w10: D5.A -1762.6,698.82 -1633.86,698.82 -1594.49,738.19 R46.2
NetJ3_1: J3.1 U8.4 | length 390.1
  Top Layer w10: U8.4 -803.35,468.7 -775,440.35 -775,275 J3.1
NetJ3_3: J3.3 U8.2 | length 409.4
  Top Layer w10: U8.2 -821.46,368.7 -800,347.24 -800,148.82 -751.18,100 J3.3
NetJ6_1: J6.1 R22.1 | length 118.4
  Top Layer w10: J6.1 1377.17,-1151.57 R22.1
NetJ6_2: J6.2 R23.2 | length 119.1
  Top Layer w10: J6.2 1375.59,-1251.57 R23.2
NetJ8_1: J8.1 R27.1 | length 118.8
  Top Layer w20: J8.1 -1623.23,1615.94 R27.1
NetJ8_2: J8.2 R28.2 | length 118.7
  Top Layer w20: R28.2 -1526.38,1615.55 J8.2
NetJ9_4: J9.4 R26.2 U6.1 | length 1323.1
  Top Layer w10: U6.1 -1649.8,965.35 R26.2 -1597.44,961.61 v1(-1574.8,984.25)
  Bottom Layer w10: v1(-1574.8,984.25) -1496.06,1062.99 -862.99,1062.99 J9.4
NetJ9_6: J9.6 R25.2 U6.4 | length 1181.7
  Top Layer w10: U6.4 -1499.8,965.35 R25.2 -661.61,961.61 J9.6
NetJ9_8: J9.8 R29.1 U6.2 U6.3 | length 1503.6
  Top Layer w10: U6.2 -1599.8,1136.42 -1574.8,1161.42 -1555.12,1161.42 ; U6.3 -1549.8,1156.1 -1555.12,1161.42 ; R29.1@-1417.32,1161.42 -1555.12,1161.42 ; R29.1 -764.37,1164.37 J9.8
NetJ10_4: J10.4 R35.1 | length 1403.7
  Top Layer w10: J10.4 300,1618.9 433.07,1751.97 R35.1
NetJ10_6: J10.6 R39.2 | length 1017.5
  Top Layer w10: J10.6 400,1187.4 551.18,1338.58 R39.2
NetJ10_10: J10.10 U12.1 | length 1433.3
  Top Layer w10: J10.10 600,1170.87 v1(629.92,1200.79) ; v1(767.72,1200.79) 1122.05,1555.12 1122.05,1791.34 1066.73,1846.65 U12.1
  Bottom Layer w10: v1(629.92,1200.79) v1(767.72,1200.79)
NetJ10_12: J10.12 U12.4 | length 1020.9
  Top Layer w10: J10.12 700,1290.55 1000,1590.55 U12.4
NetJ10_14: J10.14 R31.1 R34.2 | length 1356.7
  Top Layer w10: R34.2 1050,1968.5 ; v1(1050,1925) 1050,1968.5 ; R31.1 1050,1968.5
  Bottom Layer w10: J10.14 800,1100 825,1125 825,1700 v1(1050,1925)
NetJ10_16: J10.16 R41.1 R42.2 | length 1384.2
  Top Layer w10: R42.2 725,1968.5 ; R41.1 725,1968.5 ; v1(900,1600) 800,1600 750,1650 750,1875 725,1900 725,1968.5
  Bottom Layer w10: J10.16 v1(900,1600)
NetQ1_1: Q1.1 R32.1 R33.2 | length 156.2
  Top Layer w10: R33.2 R32.1 847.44,2202.76 Q1.1
NetQ1_3: Q1.3 R37.2 | length 466.2
  Top Layer w20: Q1.3 994.09,2194.88 v1(1043.31,2244.09) ; v1(1220.47,2066.93) 1264.17,2023.23 R37.2
  Bottom Layer w20: v1(1043.31,2244.09) v1(1220.47,2066.93)
NetQ2_1: Q2.1 R35.2 R36.2 | length 156.2
  Top Layer w10: R35.2 R36.2 532.48,2202.76 Q2.1
NetQ2_3: Q2.3 R33.1 | length 75.8
  Top Layer w10: Q2.3 695.87,2148.62 R33.1
NetQ3_1: Q3.1 R39.1 R40.2 | length 156.2
  Top Layer w10: R39.1 R40.2 650.59,1809.05 Q3.1
NetR5_2: R5.2 S3.1 | length 123.5
  Top Layer w10: R5.2 1562.01,561.02 S3.1
NetR7_2: R7.2 S4.1 | length 115.3
  Top Layer w10: R7.2 1574.8,-59.06 1584.65,-68.9 S4.1
NetR10_1: R10.1 U8.6 | length 80
  Top Layer w10: R10.1 -1159.05,418.7 U8.6
NetR11_1: R11.1 U8.5 | length 79.3
  Top Layer w10: R11.1 -1160.63,468.7 U8.5
NetR12_3: R12.3 R13.1 | length 99.6
  Top Layer w10: R13.1 -2.95,1670.28 R12.3
NetR14_3: R14.3 R15.1 | length 99.6
  Top Layer w10: R15.1 -790.35,1670.28 R14.3
NRST: C5.2 J2.6 U1.7 | length 1001.7
  Top Layer w10: U1.7 551.18,9.84 590.55,49.21 590.55,344.49 646.06,400 J2.6 ; C5.2 455.71,6.89
NSLP: J10.8 U12.2 | length 1473.4
  Top Layer w10: J10.8 500,1188.98 v1(688.98,1377.95) v1@688.98,1368.11 ; v1(767.72,1299.21) 1082.68,1614.17 1082.68,1771.65 1057.68,1796.65 U12.2
  Bottom Layer w10: v1(688.98,1377.95) v1(767.72,1299.21)
NWAKE: Q3.3 R38.1 U12.3 | length 213.1
  Top Layer w10: Q3.3 813.98,1754.92 R38.1 922.24,1754.92 930.51,1746.65 U12.3
NWE: J1.1 R2.1 U3.7 | length 362.4
  Top Layer w10: U3.7 v1(-182.48,-1043.31) R2.1@-182.48,-1006.3
  Bottom Layer w10: J1.1 -200,-1025.79 v1(-182.48,-1043.31)
PA1: J10.13 J10.15 U1.11 | length 1005.3
  Top Layer w10: U1.11 160.62,89.76 207.87,89.76 216.54,98.43 216.54,118.11 798.43,700 J10.13 J10.15
PA4: J10.7 U1.14 | length 711
  Top Layer w10: U1.14 88.58,288.58 J10.7
PA5: J10.5 U1.15 | length 677.7
  Top Layer w10: U1.15 68.9,368.9 J10.5
PA6: J10.3 U1.16 | length 644.4
  Top Layer w10: U1.16 49.21,449.21 J10.3
PA7: J10.1 U1.17 | length 611.2
  Top Layer w10: U1.17 29.53,529.53 J10.1
PA8: U1.29
PB2: J9.7 U1.20 | length 783.5
  Top Layer w10: J9.7 -310.24,610.24 -157.48,610.24 -29.53,482.28 U1.20
PB12: J13.1 R43.1 U1.25 | length 1125.4
  Top Layer w10: R43.1 -875.98,836.61 -836.61,797.24 -836.61,736.61 J13.1 -525,425 -525,375 -258.27,108.27 U1.25
PB13: J13.2 R44.1 U1.26 | length 1086.8
  Top Layer w10: R44.1 -888.19,738.19 v1(-850,700) ; J13.2 -600,399.54 -289.04,88.58 U1.26
  Bottom Layer w10: v1(-850,700) -725,575 -675,575 -650,550 -650,450 J13.2
PB14: J13.3 R45.1 U1.27 | length 1627.6
  Top Layer w10: R45.1 -1243.11,669.29 -869.29,669.29 J13.3 -650,450 -650,350 -625,325 -575,325 -318.9,68.9 U1.27
PB15: J13.4 R46.1 U1.28 | length 1580.3
  Top Layer w10: R46.1 -1312.01,639.76 -939.76,639.76 J13.4 -700,325 -650,275 -575,275 -349.21,49.21 U1.28
RESET: J2.5 S2.1 | length 807.5
  Top Layer w10: J2.5 1273.23,400 1427.17,246.06 S2.1
S: J7.5 R20.1 U5.8 | length 627.3
  Top Layer w10: J7.5 500,-874.02 610.24,-984.25 767.72,-984.25 787.4,-984.25 804.13,-1000.98 R20.1 866.14,-1043.31 889.76,-1066.93 U5.8
SCK: J5.3 P3.5 R18.1 U4.6 | length 1361.1
  Top Layer w10: P3.5 -1354.33,-1224.41 -1338.58,-1240.16 R18.1 ; v2(-1082.68,-1279.53) -1082.68,-1222.44 U4.6
  Bottom Layer w10: v2(-1279.53,-1240.16) -1240.16,-1279.53 v2(-1082.68,-1279.53) -923.62,-1279.53 -600,-955.91 J5.3
SCL: J1.3 R3.1 U3.6 | length 373.9
  Top Layer w10: U3.6 -132.48,-1057.68 v1(-118.11,-1043.31) R3.1
  Bottom Layer w10: v1(-118.11,-1043.31) -100,-1025.2 J1.3
SDA: J1.5 P7.2 R4.1 U3.5 | length 644.5
  Top Layer w10: R4.1 v1(-59.06,-1043.31) -82.48,-1066.73 U3.5 -82.48,-1177.36 -59.06,-1200.79 P7.2
  Bottom Layer w10: v1(-59.06,-1043.31) 0,-984.25 J1.5
SPI_MISO/PB4: J5.6 U1.40 | length 738.8
  Top Layer w10: J5.6 -500,-696.85 -433.07,-629.92 -413.39,-629.92 -49.21,-265.75 U1.40
SPI_MOSI/PB5: J5.8 U1.41 | length 694
  Top Layer w10: J5.8 -400,-655.91 -29.53,-285.43 U1.41
SPI_NSS/PA15: J5.2 U1.38 | length 874.5
  Top Layer w10: J5.2 -590.55,-590.55 -452.76,-590.55 -88.58,-226.38 U1.38
SPI_SCK/PB3: J5.4 U1.39 | length 805.7
  Top Layer w10: J5.4 -510.24,-610.24 -433.07,-610.24 -68.9,-246.06 U1.39
SWCLK/PA14: U1.37
SWDIO/PA13: U1.34
V5_485: C24.2 J9.2 R25.1 R26.1 R30.1 U6.8 U10.5 | length 2284.1
  Top Layer w10: U6.8 -1649.8,1224.21 -1676.18,1197.83 C24.2 -1774.61,1197.83 -1791.34,1181.1 -1791.34,984.25 -1735.24,928.15 R26.1 R25.1 -828.15,928.15 J9.2 ; v1(-1574.8,1358.27) U10.5 ; v1(-1377.95,1594.49) R30.1
  Top Layer w20: C24.2 v1(-1732.28,1279.53)
  Bottom Layer w20: v1(-1732.28,1279.53) -1653.54,1279.53 v1(-1574.8,1358.27) -1377.95,1555.12 v1(-1377.95,1594.49)
V5_CAN: C22.2 J7.6 J7.7 R21.1 U5.3 U9.5 | length 1501.6
  Top Layer w10: J7.6 J7.7 ; R21.1 573.82,-1203.74 595.87,-1225.79 U5.3 753.35,-1225.79 767.72,-1240.16 v1(767.72,-1259.84) ; U9.5 v1(1200.79,-1200.79)
  Bottom Layer w10: J7.7 767.72,-967.72 v1(767.72,-1259.84) 1141.73,-1259.84 v1(1200.79,-1200.79)
V5_LIN: C26.2 C28.2 C29.1 C30.1 C31.1 C32.2 J12.1 U11.3 | length 865
  Top Layer w20: J12.1 1216.14,816.14 C30.1 C31.1 C28.2 C29.1 C32.2 ; C31.1@1221.6,1088.14 U11.3 1378.12,1032.51 C26.2
V5_USB: C17.2 J7.8 J9.1 J12.2 P1.1 P2.1 U2.3 U7.5 U8.7 | length 6577.4
  Top Layer w10: v2(-1574.8,0) U7.5 ; v2(-1279.53,295.28) -1244.49,330.32 C17.2 -1142.72,368.7 U8.7
  Top Layer w50: v2(-1161.42,-177.17) U2.3
  Bottom Layer w10: -1328.74,344.49 -923.23,750 -700,750 ; -1279.53,-393.7 -923.23,-750 550,-750 J7.8 ; J9.1 -700,750 ; J12.2 1100,700 1050,750 -700,750
  Bottom Layer w50: v2(-1574.8,0) -1279.53,0 ; P1.1 -1328.74,-442.91 -1279.53,-393.7 -1279.53,-177.17 ; P2.1 -1328.74,344.49 v2(-1279.53,295.28) -1279.53,0 ; v2(-1161.42,-177.17) -1279.53,-177.17 ; -1279.53,-177.17 -1279.53,0
V12_LIN: C25.2 D1.2 Q1.2 R32.2 R38.2 R41.2 U11.1 U12.7 | length 1919.8
  Top Layer w10: R32.2 847.44,2127.95 Q1.2
  Top Layer w20: R41.2 842.13,1968.5 ; R38.2 866.14,1944.49 842.13,1968.5 ; Q1.2 948.62,2075 ; D1.2 D1.2@1137.8,2162.8 ; U12.7 1271.65,1796.65 v1(1300,1825) 1300,1875 1275,1900 1225,1900 1175,1950 1175,2025 1137.8,2062.2 D1.2@1137.8,2162.8 ; v1(1375,1500) 1421.65,1453.35 C25.2 1377.95,1334.25 U11.1 ; 842.13,1968.5 948.62,2075 ; 948.62,2075 1050,2075 D1.2@1137.8,2162.8
  Bottom Layer w20: v1(1300,1825) 1300,1575 v1(1375,1500)
V33: C18.2 C19.2 J11.1 J11.3 J11.5 P3.4 R16.2 R17.2 R18.2 R19.2 U2.2 U4.5 | length 3030.5
  Top Layer w10: R19.2 R18.2 -1164.37,-1181.1 ; R16.2 R17.2 -1164.37,-1181.1 ; U4.5 -1164.37,-1181.1 ; C18.2 -825,-555.51 ; J11.1 J11.3 J11.5 -755.51,-555.51 -825,-555.51 ; -1164.37,-1181.1 P3.4 -1543.9,-1181.1 -1575,-1150 -1575,-925 -1400,-750 -1250,-750 -1125,-875 -925,-875 -825,-775 -825,-555.51
  Top Layer w50: C19.2 -984.25,-555.51 ; U2.2@-984.25,-177.17 -984.25,-413.39 -984.25,-555.51 ; C18.2 -984.25,-555.51
V33_EEP: C13.2 J1.7 P7.3 R2.2 R3.2 R4.2 U3.1 U3.2 U3.8 | length 1259.7
  Top Layer w10: U3.2 -182.48,-1409.06 C13.2 -216.54,-1417.32 -232.48,-1401.38 U3.1 U3.8 -232.48,-987.99 -212.01,-967.52 R2.2 R3.2 R4.2 56.1,-967.52 ; P7.3 98.43,-1009.84 56.1,-967.52 ; J1.7 100,-923.62 56.1,-967.52
V33_POT: J4.1 R12.2 R14.2 | length 1807.4
  Top Layer w10: R14.2 -531.5,1771.65 59.06,1771.65 R12.2 157.48,1437.01 0,1279.53 J4.1
V33_USB: C16.2 R9.2 U8.3 U8.8 | length 705.1
  Top Layer w10: R9.2 -1023.62,531.5 -984.25,492.13 -984.25,334.65 -1000.2,318.7 U8.8 -1086.61,269.68 -1062.99,246.06 C16.2 ; -979.72,418.7 U8.3
VBAT: BT1.1 U1.1 | length 956.9
  Top Layer w10: v1(157.48,-196.85) 157.48,-110.24 U1.1 ; v1(885.83,-196.85) BT1.1@984.25,-98.43
  Bottom Layer w10: v1(157.48,-196.85) v1(885.83,-196.85)
VDD: C6.2 C7.2 C8.2 C9.2 C10.2 J1.8 J4.2 J11.2 J11.4 J11.6 L1.1 S1.2 S3.2 S4.2 U1.24 U1.36 U1.48 | length 5843.6
  Top Layer w10: J11.6 J11.4 J11.2 -448.43,-148.43 C9.2 -328.54,-148.43 C6.2 -288.39,-108.27 U1.36 -108.27,-108.27 v1(0,0) ; v1(-175,450) -175,380.91 C10.2 -168.11,328.54 C8.2 -134.84,252.95 -108.27,226.38 U1.24 -108.27,108.27 v1(0,0) ; C7.2@108.27,-288.39 U1.48 108.27,-108.27 v1(0,0) ; v1(433.07,49.21) 491.34,49.21 L1.1
  Bottom Layer w10: J11.6 -1.97,-500 100,-601.97 J1.8 ; v1(-175,450) -175,525 J4.2 ; v1(0,0) 49.21,49.21 v1(433.07,49.21) 1131.89,49.21 ; S1.2 1427.17,-344.49 1427.17,-246.06 ; S4.2 1427.17,-246.06 ; S3.2 1466.54,383.86 1131.89,49.21 ; 1131.89,49.21 1427.17,-246.06
VDDA: C11.1 C12.1 L1.2 U1.9 | length 357.5
  Top Layer w10: U1.9 246.06,49.21 272.64,75.79 C11.1 328.54,109.06 L1.2
WK1: C14.2 J2.7 R5.1 R6.2 | length 769.5
  Top Layer w10: J2.7 1366.14,500 1397.64,531.5 R5.1 C14.2
WK2: C15.2 J2.3 R7.1 R8.2 | length 905.2
  Top Layer w10: J2.3 1139.96,300 R7.1 C15.2
WKUP1/PA0: J2.8 U1.10 | length 819.1
  Top Layer w10: U1.10 226.38,68.9 657.48,500 J2.8
WKUP2/PC13: J2.4 U1.2 | length 1103.1
  Top Layer w10: U1.2 196.85,-88.58 216.54,-108.27 216.54,-127.95 v1(196.85,-147.64) ; v1(590.55,-147.64) 639.76,-98.43 639.76,246.06 693.7,300 J2.4
  Bottom Layer w10: v1(196.85,-147.64) v1(590.55,-147.64)
pads on no net: J10.2 P1.5 P1.6 P2.5 P2.6 P3.0 P3.1 P3.8 R12.0 R14.0 S1.3 S1.4 S2.3 S2.4 S3.3 S3.4 S4.3 S4.4 Y2.2 Y2.4

## Silkscreen, mask and mechanical layers (free items; w line width, h text height)
Top Overlay:
  text "www.github.com/taoynkkx/STM32F0_Platform" at -1181.1,1377.95 h100
  text "STM32F072 Platform A0" at -1181.1,1181.1 h180
  text "V4" at -725,875 h40
  text "RO" at -625,875 h40
  text "DI" at -525,875 h40
  text "DE" at -425,875 h40
  text "P2" at -225,875 h40
  text "P1" at -125,875 h40
  text "P1" at -125,875 h40
  text "VP" at -25,875 h40
  text "NC" at 175,875 h40
  text "MS" at 275,875 h40
  text "NW" at 375,875 h40
  text "NS" at 475,875 h40
  text "RX" at 575,875 h40
  text "TX" at 675,875 h40
  text "INH" at 775,875 h40
  text "VS" at 925,875 h40
  text "VL" at 1275,775 h40
  text "VU" at 1275,675 h40
  text "VU" at -750,600 h40
  text "B11" at -650,600 h40
  text "B10" at -525,600 h40
  text "B2" at -400,600 h40
  text "B1" at -225,600 h40
  text "B0" at -125,600 h40
  text "VD" at -25,600 h40
  text "A7" at 175,600 h40
  text "A6" at 275,600 h40
  text "A5" at 375,600 h40
  text "A4" at 475,600 h40
  text "A3" at 575,600 h40
  text "A2" at 675,600 h40
  text "A1" at 775,600 h40
  text "A1" at 875,600 h40
  text "B14" at -875,525 h40
  text "B12" at -525,475 h40
  text "A0" at 650,475 h40
  text "WK1" at 975,475 h40
  text "B13" at -525,375 h40
  text "RST" at 625,375 h40
  text "RST" at 975,375 h40
  text "B15" at -750,300 h40
  text "C13" at 625,275 h40
  text "WK2" at 975,275 h40
  text "A9" at -525,175 h40
  text "BT0" at 625,175 h40
  text "BT0" at 975,175 h40
  text "A10" at -525,75 h40
  text "V3" at -825,-325 h40
  text "VD" at -525,-325 h40
  text "V3" at -825,-425 h40
  text "VD" at -525,-425 h40
  text "V3" at -825,-525 h40
  text "VD" at -525,-525 h40
  text "A15" at -775,-625 h40
  text "B3" at -625,-625 h40
  text "B4" at -525,-625 h40
  text "B5" at -425,-625 h40
  text "GND" at -275,-625 h40
  text "B6" at -125,-625 h40
  text "B7" at -25,-625 h40
  text "VD" at 75,-625 h40
  text "B8" at 275,-625 h40
  text "B9" at 375,-625 h40
  text "VC" at 475,-625 h40
  text "VU" at 575,-625 h40
  text "CS" at -725,-900 h40
  text "CK" at -625,-900 h40
  text "DO" at -525,-900 h40
  text "DI" at -425,-900 h40
  text "WP" at -225,-900 h40
  text "CL" at -125,-900 h40
  text "DA" at -25,-900 h40
  text "VE" at 75,-900 h40
  text "RX" at 275,-900 h40
  text "TX" at 375,-900 h40
  text "S" at 475,-900 h40
  text "VC" at 575,-900 h40
Mechanical 1:
  the board outline again, w7.87

## Text inside footprints (layer, text, board x,y; h text height)
BT1: Top Overlay "+" at 1102.36,-39.37 h50 r90; Top Overlay "-" at 1102.36,-787.4 h50 r90
J1: Top Overlay "8" at 160,-720 h3.94; Top Overlay "7" at 160,-820 h3.94; Top Overlay "1" at -280,-820 h3.94; Top Overlay "2" at -300,-720 h3.94
J2: Top Overlay "8" at 820,560 h3.94 r90; Top Overlay "7" at 920,560 h3.94 r90; Top Overlay "1" at 920,120 h3.94 r90; Top Overlay "2" at 820,100 h3.94 r90
J3: Top Overlay "3" at -720,40 h3.94 r270; Top Overlay "4" at -620,40 h3.94 r270; Top Overlay "2" at -650,225 h3.94 r270; Top Overlay "1" at -650,200 h3.94 r270
J4: Top Overlay "1" at -100,800 h3.94 r180; Top Overlay "2" at 0,700 h3.94 r180; Top Overlay "5" at -260,820 h3.94 r180; Top Overlay "6" at -260,720 h3.94 r180
J5: Top Overlay "2" at -800,-720 h3.94; Top Overlay "1" at -780,-820 h3.94; Top Overlay "7" at -340,-820 h3.94; Top Overlay "8" at -340,-720 h3.94
J7: Top Overlay "8" at 660,-720 h3.94; Top Overlay "7" at 660,-820 h3.94; Top Overlay "1" at 220,-820 h3.94; Top Overlay "2" at 200,-720 h3.94
J9: Top Overlay "2" at -800,780 h3.94; Top Overlay "1" at -780,680 h3.94; Top Overlay "7" at -340,680 h3.94; Top Overlay "8" at -340,780 h3.94
J10: Top Overlay "16" at 960,780 h1; Top Overlay "15" at 960,680 h1; Top Overlay "1" at 100,680 h1; Top Overlay "2" at 100,780 h1
J11: Top Overlay "6" at -620,-560 h1 r270; Top Overlay "5" at -720,-560 h1 r270; Top Overlay "2" at -620,-200 h1 r270; Top Overlay "1" at -720,-220 h1 r270
J13: Top Overlay "3" at -760,520 h1 r180; Top Overlay "4" at -760,420 h1 r180; Top Overlay "2" at -500,420 h1 r180; Top Overlay "1" at -520,520 h1 r180
P3: Top Overlay "1" at -1476.38,-1003.94 h50 r90